# Altium PCB PT-MIS-PCB-005_v1 PCB.PcbDoc
Units mm, origin at the board's own origin, x right, y up, seen from the top; angles counter-clockwise.
Board outline 83 x 100 mm, 2 copper layers (Top Layer, Bottom Layer), stack 1.58 mm thick; 12 components, 6 nets, 43 pads, 42 vias.
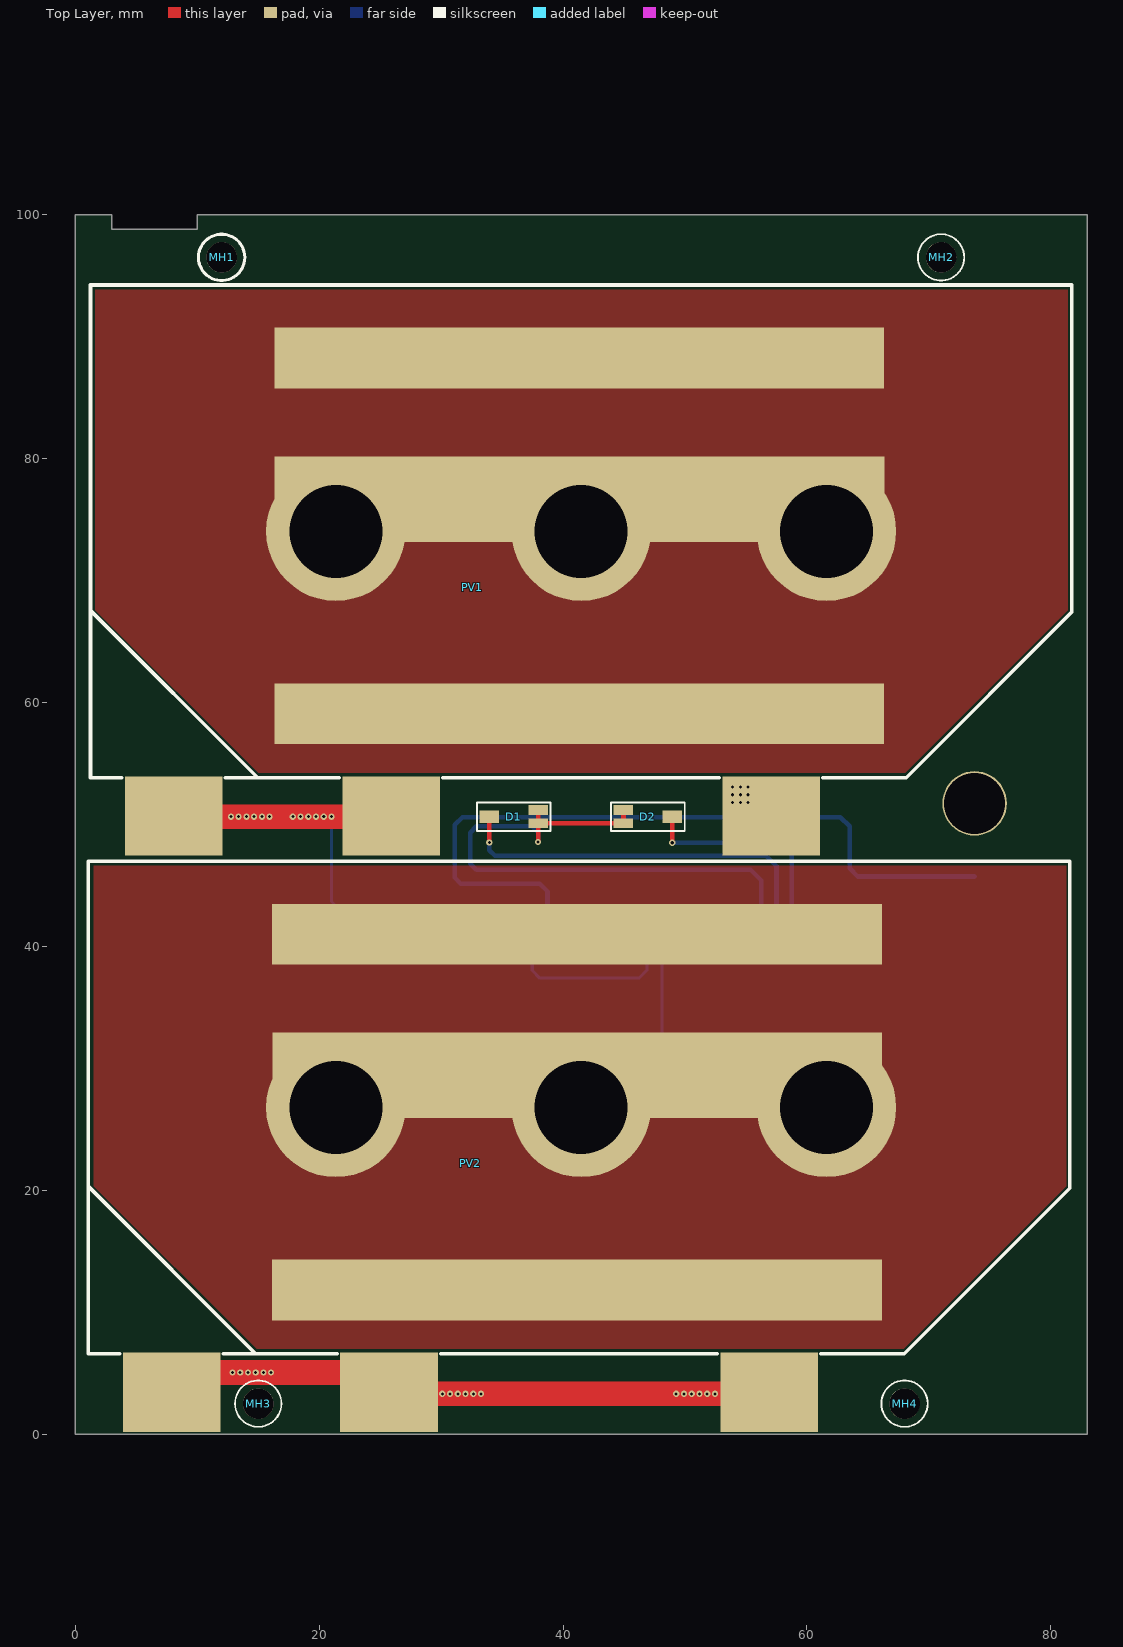
[diagram p0: Top Layer view]
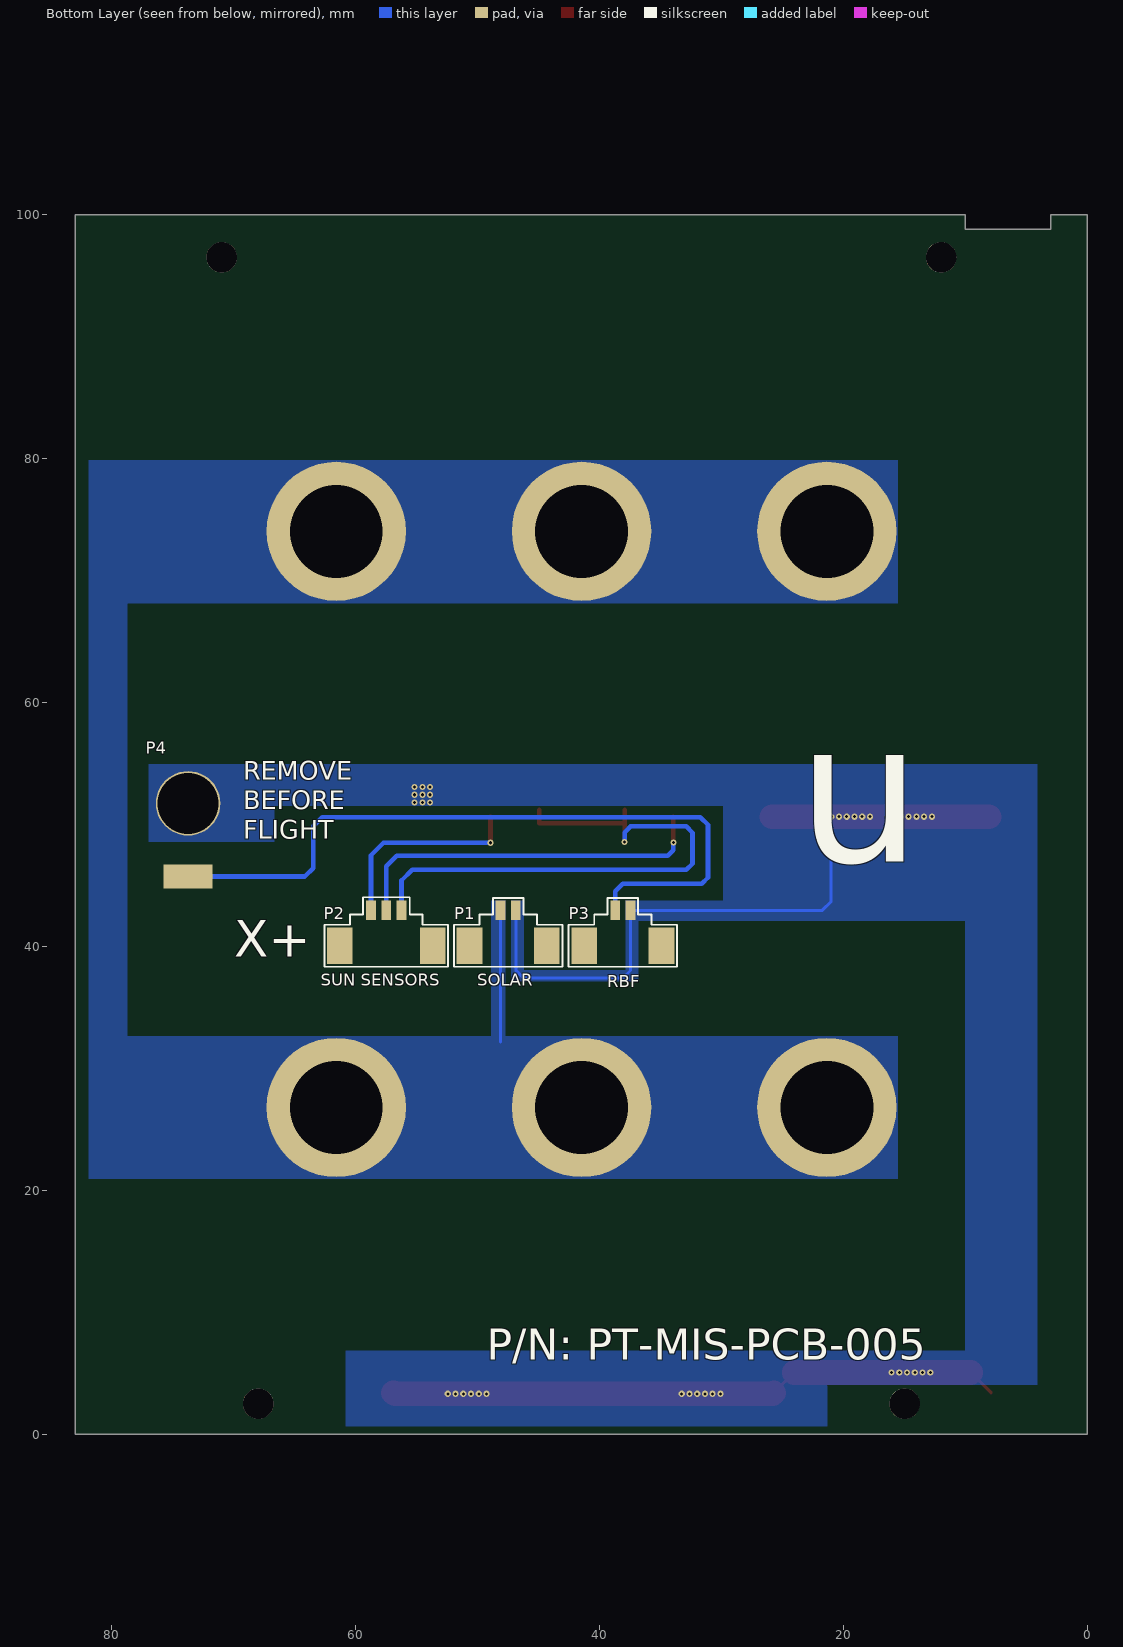
[diagram p1: Bottom Layer view, seen from below]
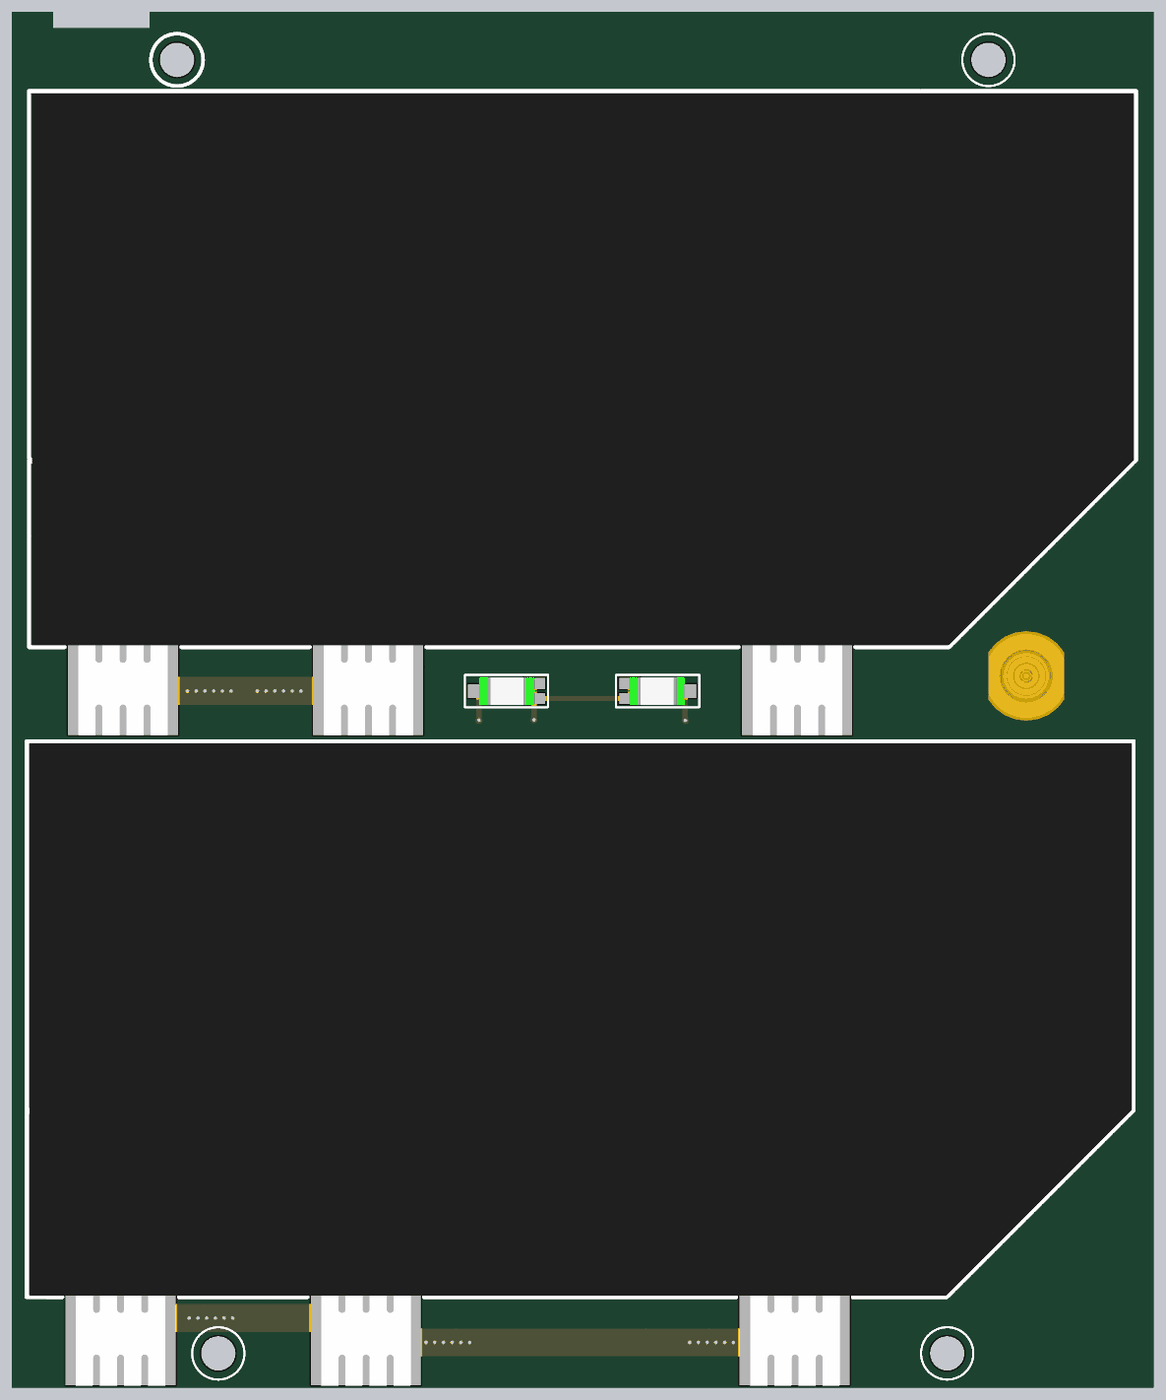
[diagram p2: 3D render of the assembled board from above, using the file's embedded part models]
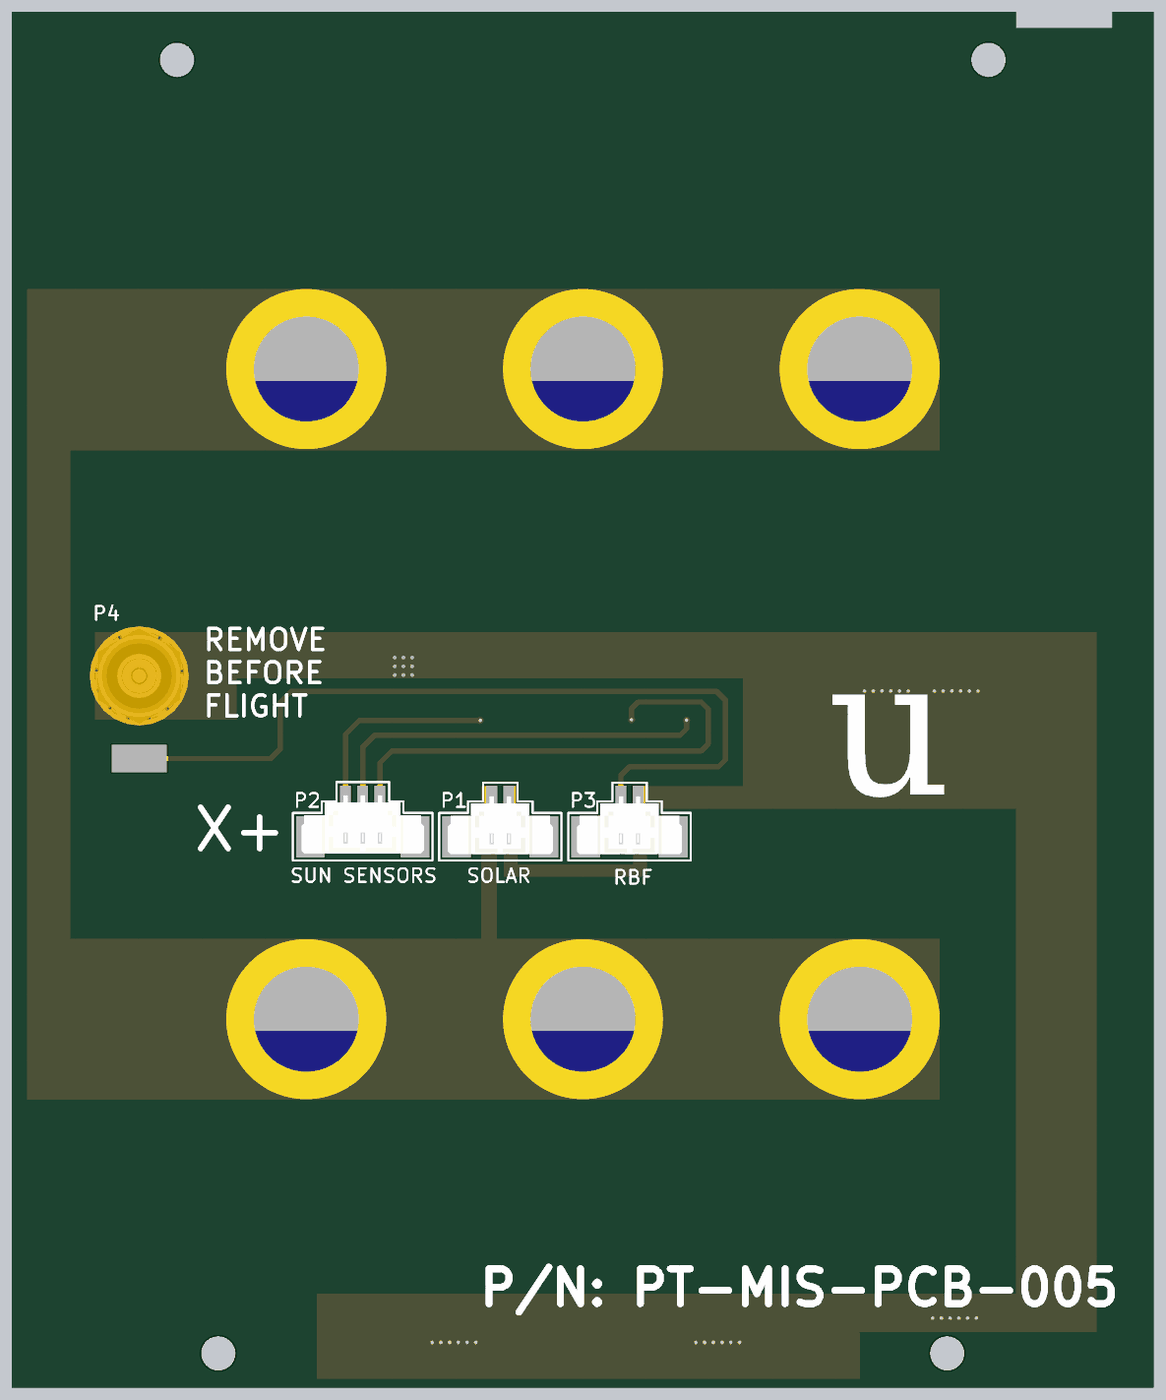
[diagram p3: 3D render of the assembled board from below, using the file's embedded part models]

## Layer stack, top to bottom
Top Solder: solder mask 0.0102, Solder Resist, Dk 3.5
Top Layer: signal copper 0.0356
Dielectric 1: dielectric 1.5086, FR-4, Dk 4.8
Bottom Layer: signal copper 0.0356
Bottom Solder: solder mask 0.0102, Solder Resist, Dk 3.5

## Board outline
0,0 0,100 3,100 3,98.8 10,98.8 10,100 83,100 83,0

## Design rules (kind name [scope] priority, off if disabled: settings)
Clearance [All] p1: gap=0.254 ignorepadtopadclearanceinfootprint=FALSE except(0: Arc-Hole Track-Hole SMDPad-Hole THPad-Hole Via-Hole Fill-Hole Poly-Hole Region-Hole Text-Hole)
PolygonConnect [All] p1: connectstyle=Direct reliefconductorwidth=0.254 reliefentries=4 polygonreliefangle="90 Angle" airgapwidth=0.254
RoutingVias [All] p1: holewidth=0.711 width=1.27 viastyle="Through Hole" minholewidth=0.711 minwidth=1.27 maxholewidth=0.711 maxwidth=1.27
SolderMaskExpansion [All] p1: expansion=0.102
Width [All] p1: maxlimit=2.54 minlimit=0.254 preferedwidth=0.254
30 further rules are at their usual default settings.

## Components (designator, comment, footprint, x,y, rotation, side; value= is the part's Value field where it differs from the comment)
D1 "TEMD6010FX01" TEMD6010FX01 35.928,50.635 r180 top
D2 "TEMD6010FX01" TEMD6010FX01 46.977,50.635 r0 top
MH1 "MH_3.8MMNC_2.5MMD" MH_3.8MMNC_2MMD_NON_COPPER_NPTH 12,96.5 r0 top
MH2 "MH_3.8MMNC_2.5MMD" MH_3.8MMNC_2MMD_NON_COPPER_NPTH 71,96.5 r0 top
MH3 "MH_3.8MMNC_2.5MMD" MH_3.8MMNC_2MMD_NON_COPPER_NPTH 15,2.5 r0 top
MH4 "MH_3.8MMNC_2.5MMD" MH_3.8MMNC_2MMD_NON_COPPER_NPTH 68,2.5 r0 top
P1 "0533980271" 0533980271 47.498,41.5 r180 bottom
P2 "0533980371" 0533980371 57.5,41.5 r180 bottom
P3 "0533980271" 0533980271 38.1,41.5 r180 bottom
P4 "133-3701-401" 133-3701-401 73.75,51.73 r90 top
PV1 "AZUR SPACE 3G30A" "AZUR SPACE 3G30A" 41.343,76.678 r180 top
PV2 "AZUR SPACE 3G30A" "AZUR SPACE 3G30A" 41.171,29.434 r180 top

## Footprints (in the part's own frame and the unit in brackets; to place one, negate y for a bottom-side part, rotate by r counter-clockwise, add the part's x,y. Pads: shape width x height; smd on the part's side, far side on the other; paste and mask are expansions set on the pad)
133-3701-401 [mm] "CONN MCX JACK STR 50 OHM SOLDER"
  rect 2x4 smd far side: 1(-6,0)
  round 5.3 hole 5: 2(0,0)
  body extent -3.6,-3.6 3.6,3.6, height 1
0533980271 [mm] "CONN HEADER 2POS 1.25MM VERT SMD"
  rect 2.1x3 smd: 0(-3.175,-1.45) 0(3.175,-1.45)
  rect 0.8x1.6 smd: 1(-0.625,1.45) 2(0.625,1.45)
  silkscreen extent -4.45,-3.17 4.45,2.48, body extent -3.82,-2.72 3.83,1.48, height 4.71
0533980371 [mm] "CONN HEADER 3POS 1.25MM VERT SMD"
  rect 2.1x3 smd: 0(-3.8,-1.45) 0(3.8,-1.45)
  rect 0.8x1.6 smd: 1(-1.25,1.45) 2(0,1.45) 3(1.25,1.45)
  silkscreen extent -5.07,-3.18 5.07,2.53, body extent -4.45,-2.67 4.45,1.53, height 4.68
"AZUR SPACE 3G30A" [mm] "30% Triple Junction GaAs Solar Cell Assembly"
  rect 50x7 smd: 1(0,0)
  rect 50x5 smd: 1(0.026,17.602) 1(0.026,-11.557)
  rect 8x6.5 smd: 2(-15.727,25.992) 2(15.448,25.992) 3(33.273,25.992)
  silkscreen extent -40.38,-17.55 40.1,22.85, body extent -40.25,-17.41 39.9,29.27, height 0.31
MH_3.8MMNC_2MMD_NON_COPPER_NPTH [mm] "Mounting Hole 3.8mm Diameter (Non Copper), 2mm Drill NPTH"
  round 2.5 hole 2.5 unplated: 1(0,0)
  silkscreen extent -1.9,-1.9 1.9,1.9
TEMD6010FX01 [mm]
  rect 1.6x0.8 smd: 1(-2.025,-0.55) 1(-2.025,0.55)
  rect 1.6x1 smd: 2(1.975,0)
  silkscreen extent -3.05,-1.17 3,1.18, body extent -2.07,-1 1.93,1, height 1.01

## Part data
D1 D2: "Ambient Light Sensor", Current - Dark (Typ)=2nA, Manufacturer="Vishay Semiconductors", Operating Temperature="-40°C ~ 100°C", Standard Package=3,000, Supplier Part Number 1=751-1051-1-ND, Voltage - DC Reverse (Vr) (Max)=16V, Active Area=0.27mm², Catalog Drawings=TEMx60x0(F)X01, Category="Sensors, Transducers", ComponentLink1Description=https://datasheet.ciiva.com/8280/temd6010-8280593.pdf, ComponentLink1URL=https://datasheet.ciiva.com/8280/temd6010-8280593.pdf, ComponentLink2Description=https://datasheet.ciiva.com/1252/temd6010-1252130.pdf, ComponentLink2URL=https://datasheet.ciiva.com/1252/temd6010-1252130.pdf, ComponentLink3Description=https://datasheet.ciiva.com/2819/temd6010-2819730.pdf, ComponentLink3URL=https://datasheet.ciiva.com/2819/temd6010-2819730.pdf, ComponentLink4Description=https://datasheet.ciiva.com/2819/temd6010-2819731.pdf, ComponentLink4URL=https://datasheet.ciiva.com/2819/temd6010-2819731.pdf, ComponentLink5Description=https://datasheet.ciiva.com/2819/temd6010-2819732.pdf, ComponentLink5URL=https://datasheet.ciiva.com/2819/temd6010-2819732.pdf, ComponentLink6Description=https://datasheet.ciiva.com/4270/temd6010-4270070.pdf, ComponentLink6URL=https://datasheet.ciiva.com/4270/temd6010-4270070.pdf, ComponentLink7Description=https://datasheet.ciiva.com/46430/1794172-46430214.pdf, ComponentLink7URL=https://datasheet.ciiva.com/46430/1794172-46430214.pdf, ComponentLink8Description=https://datasheet.ciiva.com/1249/temd6010-1249179.pdf, ComponentLink8URL=https://datasheet.ciiva.com/1249/temd6010-1249179.pdf, ComponentLink9Description=https://datasheet.ciiva.com/4697/temd6010-102586-4697659.pdf, ComponentLink9URL=https://datasheet.ciiva.com/4697/temd6010-102586-4697659.pdf, Diode Type=PIN, Family="Optical Sensors - Photodiodes", Featured Product="Surface-Mount Ambient Light Sensing Photodiodes", Manufacturer Part Number=TEMD6010FX01, Mounting Type="Surface Mount", Online Catalog="Ambient Light Sensor", Other Names=751-1051-2, Packaging="Tape & Reel (TR)", Pricing 1="1=2.26, 10=1.998, 25=1.4824, 100=1.2892, 250=1.1603, 500=1.0314, 1000=0.8863 (USD)", Product Training Modules="Ambient Light Sensors", Spectral Range="430nm ~ 610nm", Stock 1=29, Supplier 1=Digi-Key, Viewing Angle=120°, Wavelength=540nm
MH1 MH2 MH3 MH4: library part MH_3.8MMNC_2MMD, "Mounting Hole 3.8mm Diameter (Non Copper), 2.5mm Drill NPTH"
P1 P3: "2 Positions Header, Shrouded Connector 0.049\" (1.25mm) Surface Mount, Right Angle Tin", Color=Natural, Manufacturer=Molex, Supplier Part Number 1=WM7606CT-ND, Category="Connectors, Interconnects", ComponentLink1Description=https://datasheet.ciiva.com/6813/533980271-sd-6813860.pdf, ComponentLink1URL=https://datasheet.ciiva.com/6813/533980271-sd-6813860.pdf, ComponentLink2Description=https://datasheet.ciiva.com/3117/0533980271-pcb-headers-3117624.pdf, ComponentLink2URL=https://datasheet.ciiva.com/3117/0533980271-pcb-headers-3117624.pdf, ComponentLink3Description=https://datasheet.ciiva.com/3117/0533980271-pcb-headers-3117625.pdf, ComponentLink3URL=https://datasheet.ciiva.com/3117/0533980271-pcb-headers-3117625.pdf, ComponentLink4Description=https://datasheet.ciiva.com/6813/533980271-sd-6813869.pdf, ComponentLink4URL=https://datasheet.ciiva.com/6813/533980271-sd-6813869.pdf, Connector Type="Header, Shrouded", Contact Finish=Tin, Contact Finish Thickness="39µin (1.00µm)", Contact Mating Length=-, Contact Type="Blade Pin", Family="Rectangular Connectors - Headers, Male Pins", Fastening Type=-, Features="Solder Retention", Manufacturer Part Number=0533980271, Mounting Type="Surface Mount", Number of Positions=2, Number of Positions Loaded=All, Number of Rows=1, Packaging="Cut Tape (CT)", Pitch="0.049\" (1.25mm)", Pricing 1="1=0.88, 10=0.778, 100=0.6713, 500=0.5493 (USD)", Row Spacing=-, Series="PicoBlade™ 53398", Stock 1=25214, Supplier 1=Digi-Key, Termination=Solder
P2: "3 Positions Header, Shrouded Connector 0.049\" (1.25mm) Surface Mount Tin", Color=Natural, Manufacturer=Molex, Supplier Part Number 1=WM7607CT-ND, Category="Connectors, Interconnects", ComponentLink1Description=https://datasheet.ciiva.com/6813/533980271-sd-6813860.pdf, ComponentLink1URL=https://datasheet.ciiva.com/6813/533980271-sd-6813860.pdf, ComponentLink2Description=https://datasheet.ciiva.com/3117/0533980371-pcb-headers-3117626.pdf, ComponentLink2URL=https://datasheet.ciiva.com/3117/0533980371-pcb-headers-3117626.pdf, ComponentLink3Description=https://datasheet.ciiva.com/3117/0533980371-pcb-headers-3117627.pdf, ComponentLink3URL=https://datasheet.ciiva.com/3117/0533980371-pcb-headers-3117627.pdf, Connector Type="Header, Shrouded", Contact Finish=Tin, Contact Finish Thickness="39µin (1.00µm)", Contact Mating Length=-, Contact Type="Blade Pin", Family="Rectangular Connectors - Headers, Male Pins", Fastening Type=-, Features="Solder Retention", Manufacturer Part Number=0533980371, Mounting Type="Surface Mount", Number of Positions=3, Number of Positions Loaded=All, Number of Rows=1, Packaging=Digi-Reel®, Pitch="0.049\" (1.25mm)", Pricing 1="1=1.07, 10=0.942, 100=0.8126, 500=0.6649 (USD)", Row Spacing=-, Series="PicoBlade™ 53398", Stock 1=26974, Supplier 1=Digi-Key, Termination=Solder
P4: "MCX Connector Jack, Female Socket 50 Ohm Panel Mount Solder Cup", Manufacturer="Bel Cinch", Maximum Frequency="6 GHz", Operating Temperature Range="- 65 C to + 165 C", Supplier Part Number 1=J545-ND, Body Finish=Gold, Body Material=Brass, Body Style=Bulkhead, Brand="Johnson / Cinch Connectivity Solutions", ComponentLink1Description=https://datasheet.ciiva.com/643/dr-1333701401-643363.pdf, ComponentLink1URL=https://datasheet.ciiva.com/643/dr-1333701401-643363.pdf, ComponentLink2Description=https://datasheet.ciiva.com/23769/1759952-23769432.pdf, ComponentLink2URL=https://datasheet.ciiva.com/23769/1759952-23769432.pdf, ComponentLink3Description=https://datasheet.ciiva.com/14567/70090550-14567161.pdf, ComponentLink3URL=https://datasheet.ciiva.com/14567/70090550-14567161.pdf, ComponentLink4Description=https://datasheet.ciiva.com/30166/pi-133-3701-401-30166138.pdf, ComponentLink4URL=https://datasheet.ciiva.com/30166/pi-133-3701-401-30166138.pdf, ComponentLink5Description=https://datasheet.ciiva.com/9421/pi-133-3701-406-9421739.pdf, ComponentLink5URL=https://datasheet.ciiva.com/9421/pi-133-3701-406-9421739.pdf, Contact Plating=Gold, Factory Pack Quantity=25, Gender=Jack, Impedance="50 Ohms", Manufacturer Part Number=133-3701-401, Orientation=Straight, Packaging=Bulk, Polarity=Standard, Product=Connectors, Product Category="RF Connectors / Coaxial Connectors", RF Series=MCX, RoHS=Details, Series=MCX, Stock 1=0, Supplier 1=Digi-Key, Termination Style=Solder
PV1 PV2: "30% Triple Junction GaAs Solar Cell Assembly", Current at max. Power="502.9 mA", Voltage at max.Power="2409 mV", Average Efficiency (1353 W/m^2)=29.6, Average Efficiency (1367 W/m^2)=29.3, Average Open Circuit (BOL)="2690 mV", Average Short Circuit (BOL)="519.6 mA"

## Free pads (board coordinates)
  round 11.43 hole 7.62: 2(21.364,74.031) 2(21.365,26.787) 2(41.484,26.787) 2(41.484,74.031) 2(61.603,74.031) 2(61.604,26.787)

## Via types
v1: diameter 0.508, hole 0.254, Top Layer to Bottom Layer, tented both sides, 42 vias

## Nets (pads, with @x,y where several pads share a name; then routed paths per layer and width w, separated by ;. In a path a pad name is that pad's centre, name@x,y a point inside that pad or via, vN(x,y) a via of type N, cw(c..) or ccw(c..) an arc to the next point about the centre after c; other vN are vias at no path point)
2.35V: P1.1 pad.2 PV1.1 PV2.1 | length 10.8
  Bottom Layer w0.254: 48.123,32.172 P1.1
GND: P1.2 P3.2 P4.2 PV1.2 PV1.3 PV2.2 PV2.3 | length 111.8
  Top Layer w0.254: PV2.3@7.898,3.391 PV2.3@9.57,5.063 ; PV2.2@24.05,5.063 PV2.2@25.723,3.391
  Top Layer w2.032: PV1.3@8.07,50.635 v1(12.757,50.635) v1(13.392,50.635) v1(14.027,50.635) v1(14.662,50.635) v1(15.297,50.635) v1(15.932,50.635) v1(17.837,50.635) v1(18.472,50.635) v1(19.107,50.635) v1(19.742,50.635) v1(20.377,50.635) v1(21.012,50.635) PV1.2@25.895,50.635 ; PV2.3@9.57,5.063 v1(12.884,5.063) v1(13.519,5.063) v1(14.154,5.063) v1(14.789,5.063) v1(15.424,5.063) v1(16.059,5.063) PV2.2@24.05,5.063 ; PV2.2@25.723,3.391 25.812,3.302 v1(30.099,3.302) v1(30.734,3.302) v1(31.369,3.302) v1(32.004,3.302) v1(32.639,3.302) v1(33.274,3.302) v1(49.276,3.302) v1(49.911,3.302) v1(50.546,3.302) v1(51.181,3.302) v1(51.816,3.302) v1(52.451,3.302) 56.809,3.302 PV2.2@56.898,3.391
  Bottom Layer w0.254: v1(21.012,50.635) 21.012,43.682 21.744,42.95 P3.2 37.475,38.014 38.1,37.389 46.228,37.389 46.873,38.034 P1.2
  other v1: 53.905,51.799 54.54,51.799 55.175,51.799 53.905,52.434 54.54,52.434 55.175,52.434 53.905,53.069 54.54,53.069 55.175,53.069
NetD1_1: D1.1 D2.1 P2.3 | length 46.9
  Top Layer w0.381: v1(37.953,48.547) D1.1@37.953,50.085 ; D1.1@37.953,51.185 D1.1@37.953,50.085 ; D2.1@44.952,51.185 44.952,50.085 D1.1@37.953,50.085
  Bottom Layer w0.381: v1(37.953,48.547) 37.953,49.347 37.465,49.835 32.893,49.835 32.385,49.327 32.385,46.787 32.893,46.279 55.372,46.279 56.25,45.401 P2.3
NetD1_2: D1.2 P2.2 | length 30.5
  Top Layer w0.381: v1(33.953,48.51) D1.2
  Bottom Layer w0.381: v1(33.953,48.51) 33.953,47.886 34.417,47.422 56.642,47.422 57.5,46.564 P2.2
NetD2_2: D2.2 P2.1 | length 16.9
  Top Layer w0.381: v1(48.952,48.497) D2.2
  Bottom Layer w0.381: v1(48.952,48.497) 57.725,48.497 58.75,47.473 P2.1
RBF: P3.1 P4.1 | length 60.9
  Bottom Layer w0.381: P3.1 38.725,44.511 38.1,45.136 31.623,45.136 31.115,45.644 31.115,49.962 31.75,50.597 62.738,50.597 63.5,49.835 63.5,46.406 64.176,45.73 P4.1
pads on no net: MH1.1 MH2.1 MH3.1 MH4.1 P1.0 P2.0 P3.0

## Polygon pours and split planes (outlines as drawn)
GND on Bottom Layer "Bottom Layer-No Net 1" (solid, remove dead copper, pour order 70): 46.228,43.739 47.244,43.739 47.244,37.135 36.83,37.135 36.83,42.215 37.846,42.215 37.846,38.024 46.228,38.024
2.35V on Bottom Layer "Bottom Layer-No Net 1" (solid, remove dead copper, pour order 68): 47.752,43.739 47.752,32.563 48.895,32.563 48.895,43.739
GND on Bottom Layer "Bottom Layer-No Net 1" (solid, pour order 66): 21.463,43.739 21.463,49.962 29.845,49.962 29.845,43.739
GND on Bottom Layer "Bottom Layer-No Net 1" (solid, pour order 64): 10,49.962 10,43.739 21.463,43.739 21.463,49.962
GND on Bottom Layer "Bottom Layer-No Net 1" (solid, remove dead copper, pour order 62): 10,43.739 37.846,43.739 37.846,42.088 10,42.088
2.35V on Bottom Layer "Bottom Layer-No Net 1" (solid, pour order 58): 81.915,68.123 78.74,68.123 78.74,32.563 81.915,32.563
GND on Bottom Layer "Bottom Layer-No Net 1" (solid, remove dead copper, pour order 50): 66.675,54.915 76.962,54.915 76.962,48.565 66.675,48.565
GND on Bottom Layer "Bottom Layer-No Net 1" (solid, pour order 48): 21.336,4.064 21.336,0.635 60.833,0.635 60.833,4.047
GND on Bottom Layer "Bottom Layer-No Net 1" (solid, pour order 36): 4.121,50.021 10,50.021 10,5.825 4.121,5.825
GND on Bottom Layer "Bottom Layer-No Net 1" (solid, remove dead copper, pour order 34): 60.833,6.841 60.833,4.047 4.121,4.047 4.121,6.841
GND on Bottom Layer "Bottom Layer-No Net 1" (solid, remove dead copper, pour order 30): 70.485,54.915 4.121,54.915 4.121,49.767 21.52,49.767 21.52,51.545 70.485,51.545
GND on Bottom Layer "Bottom Layer-No Net 1" (solid, remove dead copper, pour order 28): 29.845,51.545 29.845,49.767 4.121,49.767 4.121,51.545
2.35V on Bottom Layer "Bottom Layer-No Net 1" (solid, remove dead copper, pour order 24): 15.551,79.866 15.551,68.123 81.915,68.123 81.915,79.866
2.35V on Bottom Layer "Bottom Layer-No Net 1" (solid, remove dead copper, pour order 18): 15.551,32.622 15.551,20.938 81.915,20.938 81.915,32.622
2.35V on Top Layer "Bottom Layer-No Net 1" (solid, remove dead copper, pour order 76): 1.524,46.609 1.524,20.32 14.859,6.985 67.945,6.985 81.28,20.32 81.28,46.609
2.35V on Top Layer "Bottom Layer-No Net 1" (solid, remove dead copper, pour order 72): 1.651,93.853 1.651,67.564 14.986,54.229 68.072,54.229 81.407,67.564 81.407,93.853

## Silkscreen, mask and mechanical layers (free items; w line width, h text height)
Top Overlay:
  circle w0.254: c12,96.5 r1.9
Bottom Overlay:
  text "REMOVE" at 69.215,53.645 h1.52
  text "BEFORE" at 69.215,51.232 h1.52
  text "FLIGHT" at 69.215,48.819 h1.52
  text "u" at 23.749,43.104 h20
  text "X+" at 69.977,39.167 h3
  text "SOLAR" at 50.038,36.754 h1
  text "SUN SENSORS" at 62.865,36.754 h1
  text "RBF" at 39.37,36.627 h1
  text "P/N: PT-MIS-PCB-005" at 49.255,6.083 h2.54
Mechanical Drawing:
  circle w0.254: c71,96.551 r1.272
  circle w0.254: c12,96.551 r1.239
  circle w0.254: c15,2.551 r1.257
  circle w0.254: c68,2.551 r1.216
  lines w0.15: 0,0 83,0 ; 0,0 0,100 ; 0,0 0,100 ; 0,0 83,0 ; 0,100 3,100 ; 0,100 3,100 ; 3,98.8 3,100 ; 3,98.8 10,98.8 ; 3,98.8 10,98.8 ; 3,98.8 3,100 ; 10,98.8 10,100 ; 10,98.8 10,100 ; 10,100 83,100 ; 10,100 83,100 ; 83,0 83,100 ; 83,0 83,100
  text "Mechanical Drawing of PT-MIS-PCB-005_v1" at 13.716,106.223 h1.52
  text "Units: mm" at -16.383,-8.89 h1.52
  text "Scale: 1:1" at -16.383,-11.43 h1.52
Board Outline:
  the board outline again, w0.15
ASM Top:
  text "Assembly TOP of PT-MIS-PCB-005_v1" at 17.653,100.889 h1.52
ASM Bottom:
  text "Assembly BOTTOM of PT-MIS-PCB-003_v1" at 15.621,103.683 h1.52

## Dimensions
0,0 to 0,100 on Mechanical Drawing
0,0 to 83,0 on Mechanical Drawing
15,1.294 to 0,0 on Mechanical Drawing
68,2.159 to 15,2.032 on Mechanical Drawing
3,100 to 3,98.8 on Mechanical Drawing
3,100 to 10,100 on Mechanical Drawing
15,2.362 to 0,0 on Mechanical Drawing